# Altium PCB PCB1.PcbDoc
Units mm, origin at the board's own origin, x right, y up, seen from the top; angles counter-clockwise.
Board outline 152.4 x 101.6 mm, 2 copper layers (Top Layer, Bottom Layer); 130 components, 1 nets, 274 pads, 128 vias.
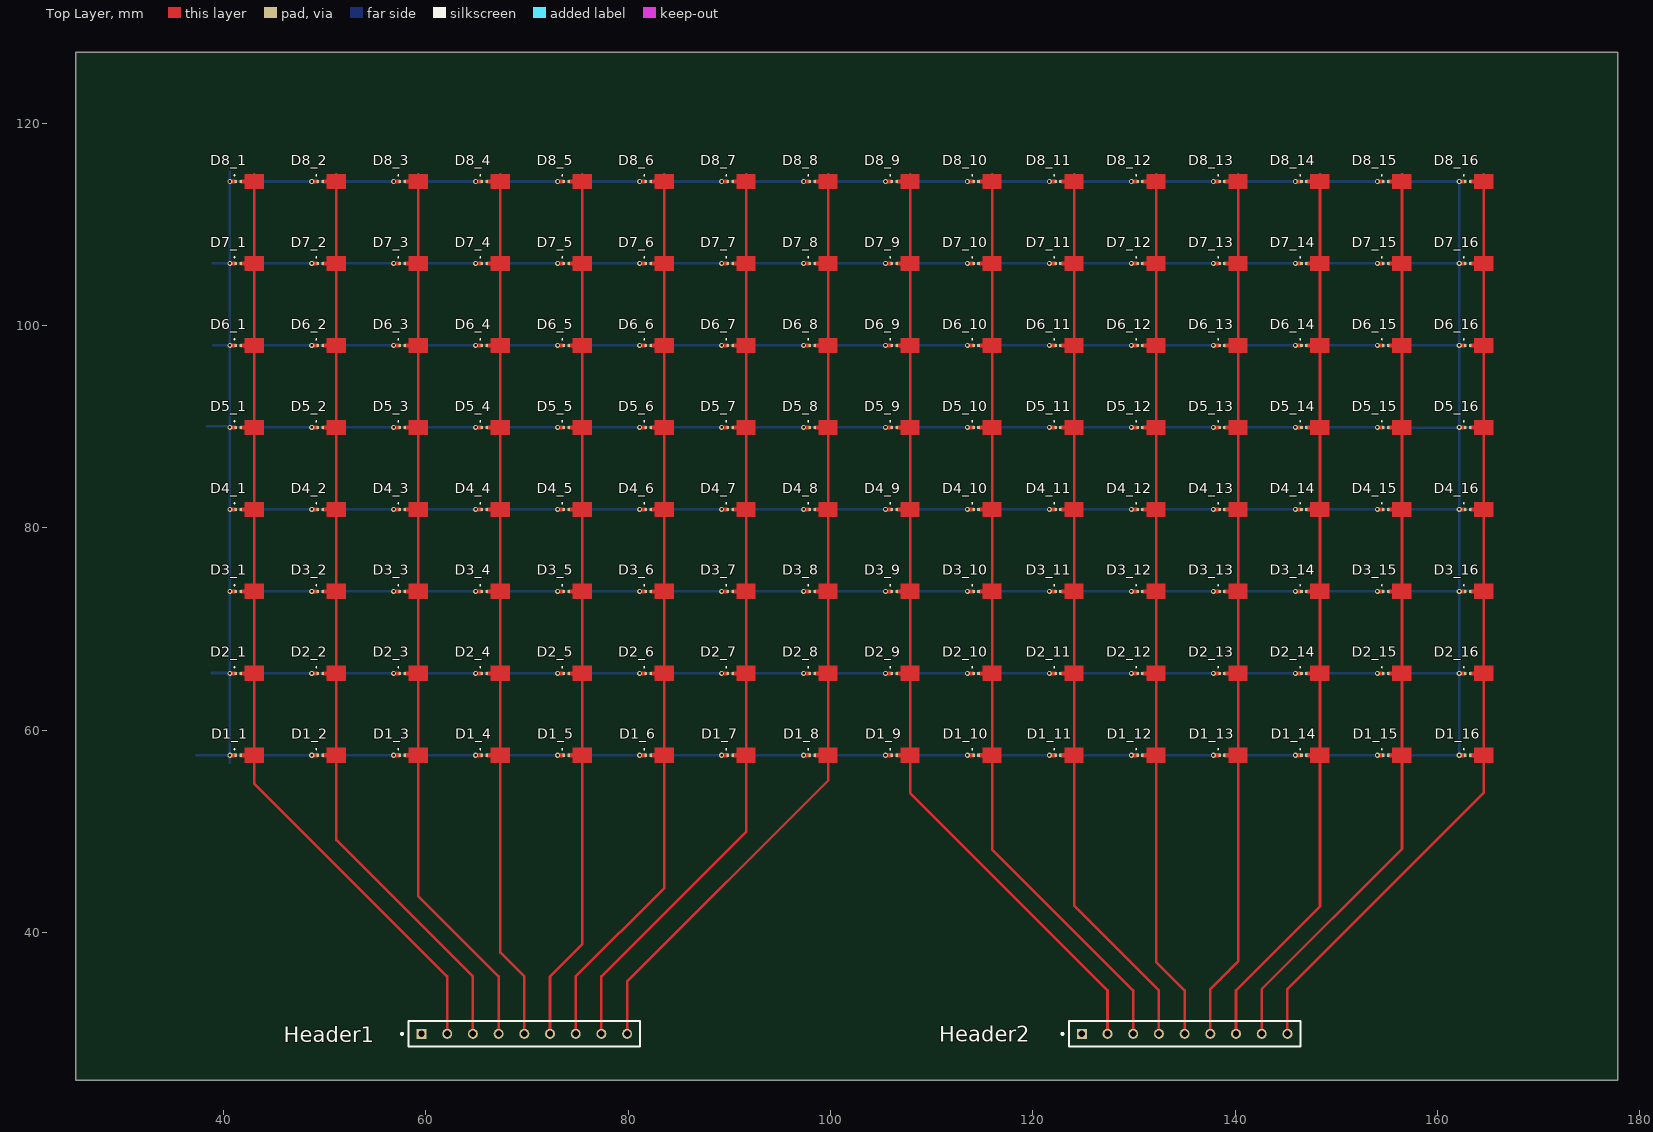
[diagram p0: Top Layer view]
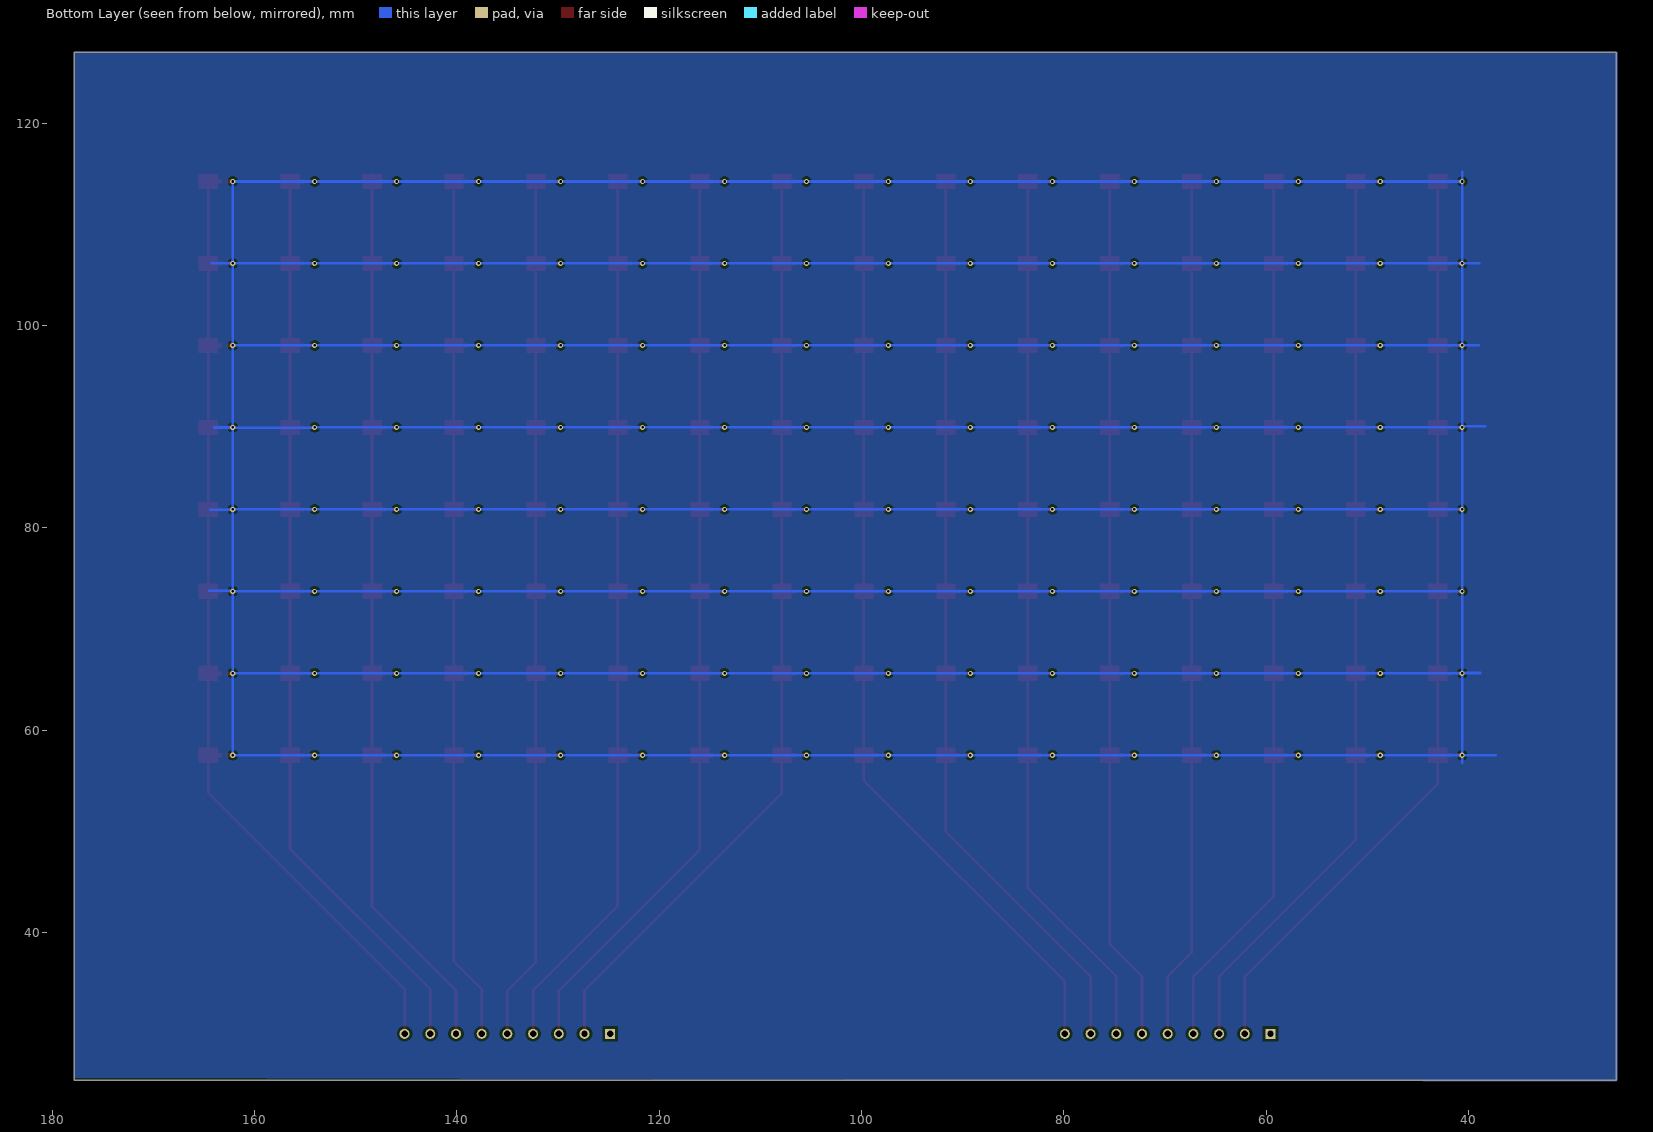
[diagram p1: Bottom Layer view, seen from below]

## Layer stack, top to bottom
Top Solder: solder mask 0.0102, Solder Resist, Dk 3.5
Top Layer: signal copper 0.0356
Dielectric 1: dielectric 0.32, RO4350B , Dk 3.48
Bottom Layer: signal copper 0.0356
Bottom Solder: solder mask 0.0102, Solder Resist, Dk 3.5

## Board outline
25.4,25.4 177.8,25.4 177.8,127 25.4,127

## Design rules (kind name [scope] priority, off if disabled: settings)
Clearance [All] p1: gap=0.254 ignorepadtopadclearanceinfootprint=FALSE
PolygonConnect [All] p1: connectstyle=Relief reliefconductorwidth=0.254 reliefentries=4 polygonreliefangle="90 Angle" airgapwidth=0.254
RoutingVias [All] p1: holewidth=0.711 width=1.27 viastyle="Through Hole" minholewidth=0.711 minwidth=1.27 maxholewidth=0.711 maxwidth=1.27
SolderMaskExpansion [All] p1: expansion=0.102 istentingtop=FALSE
Width [All] p1: maxlimit=0.254 minlimit=0.254 preferedwidth=0.254
30 further rules are at their usual default settings.

## Components (designator, comment, footprint, x,y, rotation, side; value= is the part's Value field where it differs from the comment)
D1_1 "Comment" DFN48P76X20-2N 41.49,57.531 r0 top
D1_2 "Comment" DFN48P76X20-2N 49.59,57.531 r0 top
D1_3 "Comment" DFN48P76X20-2N 57.69,57.531 r0 top
D1_4 "Comment" DFN48P76X20-2N 65.79,57.531 r0 top
D1_5 "Comment" DFN48P76X20-2N 73.89,57.531 r0 top
D1_6 "Comment" DFN48P76X20-2N 81.99,57.531 r0 top
D1_7 "Comment" DFN48P76X20-2N 90.09,57.531 r0 top
D1_8 "Comment" DFN48P76X20-2N 98.19,57.531 r0 top
D1_9 "Comment" DFN48P76X20-2N 106.29,57.531 r0 top
D1_10 "Comment" DFN48P76X20-2N 114.39,57.531 r0 top
D1_11 "Comment" DFN48P76X20-2N 122.49,57.531 r0 top
D1_12 "Comment" DFN48P76X20-2N 130.59,57.531 r0 top
D1_13 "Comment" DFN48P76X20-2N 138.69,57.531 r0 top
D1_14 "Comment" DFN48P76X20-2N 146.79,57.531 r0 top
D1_15 "Comment" DFN48P76X20-2N 154.89,57.531 r0 top
D1_16 "Comment" DFN48P76X20-2N 162.99,57.531 r0 top
D2_1 "Comment" DFN48P76X20-2N 41.49,65.631 r0 top
D2_2 "Comment" DFN48P76X20-2N 49.59,65.631 r0 top
D2_3 "Comment" DFN48P76X20-2N 57.69,65.631 r0 top
D2_4 "Comment" DFN48P76X20-2N 65.79,65.631 r0 top
D2_5 "Comment" DFN48P76X20-2N 73.89,65.631 r0 top
D2_6 "Comment" DFN48P76X20-2N 81.99,65.631 r0 top
D2_7 "Comment" DFN48P76X20-2N 90.09,65.631 r0 top
D2_8 "Comment" DFN48P76X20-2N 98.19,65.631 r0 top
D2_9 "Comment" DFN48P76X20-2N 106.29,65.631 r0 top
D2_10 "Comment" DFN48P76X20-2N 114.39,65.631 r0 top
D2_11 "Comment" DFN48P76X20-2N 122.49,65.631 r0 top
D2_12 "Comment" DFN48P76X20-2N 130.59,65.631 r0 top
D2_13 "Comment" DFN48P76X20-2N 138.69,65.631 r0 top
D2_14 "Comment" DFN48P76X20-2N 146.79,65.631 r0 top
D2_15 "Comment" DFN48P76X20-2N 154.89,65.631 r0 top
D2_16 "Comment" DFN48P76X20-2N 162.99,65.631 r0 top
D3_1 "Comment" DFN48P76X20-2N 41.49,73.731 r0 top
D3_2 "Comment" DFN48P76X20-2N 49.59,73.731 r0 top
D3_3 "Comment" DFN48P76X20-2N 57.69,73.731 r0 top
D3_4 "Comment" DFN48P76X20-2N 65.79,73.731 r0 top
D3_5 "Comment" DFN48P76X20-2N 73.89,73.731 r0 top
D3_6 "Comment" DFN48P76X20-2N 81.99,73.731 r0 top
D3_7 "Comment" DFN48P76X20-2N 90.09,73.731 r0 top
D3_8 "Comment" DFN48P76X20-2N 98.19,73.731 r0 top
D3_9 "Comment" DFN48P76X20-2N 106.29,73.731 r0 top
D3_10 "Comment" DFN48P76X20-2N 114.39,73.731 r0 top
D3_11 "Comment" DFN48P76X20-2N 122.49,73.731 r0 top
D3_12 "Comment" DFN48P76X20-2N 130.59,73.731 r0 top
D3_13 "Comment" DFN48P76X20-2N 138.69,73.731 r0 top
D3_14 "Comment" DFN48P76X20-2N 146.79,73.731 r0 top
D3_15 "Comment" DFN48P76X20-2N 154.89,73.731 r0 top
D3_16 "Comment" DFN48P76X20-2N 162.99,73.731 r0 top
D4_1 "Comment" DFN48P76X20-2N 41.49,81.831 r0 top
D4_2 "Comment" DFN48P76X20-2N 49.59,81.831 r0 top
D4_3 "Comment" DFN48P76X20-2N 57.69,81.831 r0 top
D4_4 "Comment" DFN48P76X20-2N 65.79,81.831 r0 top
D4_5 "Comment" DFN48P76X20-2N 73.89,81.831 r0 top
D4_6 "Comment" DFN48P76X20-2N 81.99,81.831 r0 top
D4_7 "Comment" DFN48P76X20-2N 90.09,81.831 r0 top
D4_8 "Comment" DFN48P76X20-2N 98.19,81.831 r0 top
D4_9 "Comment" DFN48P76X20-2N 106.29,81.831 r0 top
D4_10 "Comment" DFN48P76X20-2N 114.39,81.831 r0 top
D4_11 "Comment" DFN48P76X20-2N 122.49,81.831 r0 top
D4_12 "Comment" DFN48P76X20-2N 130.59,81.831 r0 top
D4_13 "Comment" DFN48P76X20-2N 138.69,81.831 r0 top
D4_14 "Comment" DFN48P76X20-2N 146.79,81.831 r0 top
D4_15 "Comment" DFN48P76X20-2N 154.89,81.831 r0 top
D4_16 "Comment" DFN48P76X20-2N 162.99,81.831 r0 top
D5_1 "Comment" DFN48P76X20-2N 41.49,89.931 r0 top
D5_2 "Comment" DFN48P76X20-2N 49.59,89.931 r0 top
D5_3 "Comment" DFN48P76X20-2N 57.69,89.931 r0 top
D5_4 "Comment" DFN48P76X20-2N 65.79,89.931 r0 top
D5_5 "Comment" DFN48P76X20-2N 73.89,89.931 r0 top
D5_6 "Comment" DFN48P76X20-2N 81.99,89.931 r0 top
D5_7 "Comment" DFN48P76X20-2N 90.09,89.931 r0 top
D5_8 "Comment" DFN48P76X20-2N 98.19,89.931 r0 top
D5_9 "Comment" DFN48P76X20-2N 106.29,89.931 r0 top
D5_10 "Comment" DFN48P76X20-2N 114.39,89.931 r0 top
D5_11 "Comment" DFN48P76X20-2N 122.49,89.931 r0 top
D5_12 "Comment" DFN48P76X20-2N 130.59,89.931 r0 top
D5_13 "Comment" DFN48P76X20-2N 138.69,89.931 r0 top
D5_14 "Comment" DFN48P76X20-2N 146.79,89.931 r0 top
D5_15 "Comment" DFN48P76X20-2N 154.89,89.931 r0 top
D5_16 "Comment" DFN48P76X20-2N 162.99,89.931 r0 top
D6_1 "Comment" DFN48P76X20-2N 41.49,98.031 r0 top
D6_2 "Comment" DFN48P76X20-2N 49.59,98.031 r0 top
D6_3 "Comment" DFN48P76X20-2N 57.69,98.031 r0 top
D6_4 "Comment" DFN48P76X20-2N 65.79,98.031 r0 top
D6_5 "Comment" DFN48P76X20-2N 73.89,98.031 r0 top
D6_6 "Comment" DFN48P76X20-2N 81.99,98.031 r0 top
D6_7 "Comment" DFN48P76X20-2N 90.09,98.031 r0 top
D6_8 "Comment" DFN48P76X20-2N 98.19,98.031 r0 top
D6_9 "Comment" DFN48P76X20-2N 106.29,98.031 r0 top
D6_10 "Comment" DFN48P76X20-2N 114.39,98.031 r0 top
D6_11 "Comment" DFN48P76X20-2N 122.49,98.031 r0 top
D6_12 "Comment" DFN48P76X20-2N 130.59,98.031 r0 top
D6_13 "Comment" DFN48P76X20-2N 138.69,98.031 r0 top
D6_14 "Comment" DFN48P76X20-2N 146.79,98.031 r0 top
D6_15 "Comment" DFN48P76X20-2N 154.89,98.031 r0 top
D6_16 "Comment" DFN48P76X20-2N 162.99,98.031 r0 top
D7_1 "Comment" DFN48P76X20-2N 41.49,106.131 r0 top
D7_2 "Comment" DFN48P76X20-2N 49.59,106.131 r0 top
D7_3 "Comment" DFN48P76X20-2N 57.69,106.131 r0 top
D7_4 "Comment" DFN48P76X20-2N 65.79,106.131 r0 top
D7_5 "Comment" DFN48P76X20-2N 73.89,106.131 r0 top
D7_6 "Comment" DFN48P76X20-2N 81.99,106.131 r0 top
D7_7 "Comment" DFN48P76X20-2N 90.09,106.131 r0 top
D7_8 "Comment" DFN48P76X20-2N 98.19,106.131 r0 top
D7_9 "Comment" DFN48P76X20-2N 106.29,106.131 r0 top
D7_10 "Comment" DFN48P76X20-2N 114.39,106.131 r0 top
D7_11 "Comment" DFN48P76X20-2N 122.49,106.131 r0 top
D7_12 "Comment" DFN48P76X20-2N 130.59,106.131 r0 top
D7_13 "Comment" DFN48P76X20-2N 138.69,106.131 r0 top
D7_14 "Comment" DFN48P76X20-2N 146.79,106.131 r0 top
D7_15 "Comment" DFN48P76X20-2N 154.89,106.131 r0 top
D7_16 "Comment" DFN48P76X20-2N 162.99,106.131 r0 top
D8_1 "Comment" DFN48P76X20-2N 41.49,114.231 r0 top
D8_2 "Comment" DFN48P76X20-2N 49.59,114.231 r0 top
D8_3 "Comment" DFN48P76X20-2N 57.69,114.231 r0 top
D8_4 "Comment" DFN48P76X20-2N 65.79,114.231 r0 top
D8_5 "Comment" DFN48P76X20-2N 73.89,114.231 r0 top
D8_6 "Comment" DFN48P76X20-2N 81.99,114.231 r0 top
D8_7 "Comment" DFN48P76X20-2N 90.09,114.231 r0 top
D8_8 "Comment" DFN48P76X20-2N 98.19,114.231 r0 top
D8_9 "Comment" DFN48P76X20-2N 106.29,114.231 r0 top
D8_10 "Comment" DFN48P76X20-2N 114.39,114.231 r0 top
D8_11 "Comment" DFN48P76X20-2N 122.49,114.231 r0 top
D8_12 "Comment" DFN48P76X20-2N 130.59,114.231 r0 top
D8_13 "Comment" DFN48P76X20-2N 138.69,114.231 r0 top
D8_14 "Comment" DFN48P76X20-2N 146.79,114.231 r0 top
D8_15 "Comment" DFN48P76X20-2N 154.89,114.231 r0 top
D8_16 "Comment" DFN48P76X20-2N 162.99,114.231 r0 top
Header1 "Comment" SAMTEC_TS-109-G-AA 69.746,30 r0 top
Header2 "Comment" SAMTEC_TS-109-G-AA 135.001,30 r0 top

## Footprints (in the part's own frame and the unit in brackets; to place one, negate y for a bottom-side part, rotate by r counter-clockwise, add the part's x,y. Pads: shape width x height; smd on the part's side, far side on the other; paste and mask are expansions set on the pad)
DFN48P76X20-2N [mm] "DFN, 2-Leads, Body 0.39x0.76mm, Pitch 0.48mm, IPC Medium Density"
  rect 0.25x0.3 smd: 1(-0.24,0) 2(0.24,0)
  silkscreen extent -0.43,0.55 -0.34,0.65, body extent -0.39,-0.2 0.39,0.2, height 0.2
SAMTEC_TS-109-G-AA [mm]
  rect 0.985x0.985 / inner round 0.985 / far side rect 0.985x0.985 hole 0.635: 01(-10.16,0)
  round 0.985 hole 0.635: 02(-7.62,0) 03(-5.08,0) 04(-2.54,0) 05(0,0) 06(2.54,0) 07(5.08,0) 08(7.62,0) 09(10.16,0)
  silkscreen extent -12.18,-1.27 11.43,1.27

## Via types
v1: diameter 0.5, hole 0.25, Top Layer to Bottom Layer, 128 vias

## Nets (pads, with @x,y where several pads share a name; then routed paths per layer and width w, separated by ;. In a path a pad name is that pad's centre, name@x,y a point inside that pad or via, vN(x,y) a via of type N, cw(c..) or ccw(c..) an arc to the next point about the centre after c; other vN are vias at no path point)
GND: 
  other v1: 40.64,57.531
pads on no net: D1_1.1 D1_1.2 D1_2.1 D1_2.2 D1_3.1 D1_3.2 D1_4.1 D1_4.2 D1_5.1 D1_5.2 D1_6.1 D1_6.2 D1_7.1 D1_7.2 D1_8.1 D1_8.2 D1_9.1 D1_9.2 D1_10.1 D1_10.2 D1_11.1 D1_11.2 D1_12.1 D1_12.2 D1_13.1 D1_13.2 D1_14.1 D1_14.2 D1_15.1 D1_15.2 D1_16.1 D1_16.2 D2_1.1 D2_1.2 D2_2.1 D2_2.2 D2_3.1 D2_3.2 D2_4.1 D2_4.2 D2_5.1 D2_5.2 D2_6.1 D2_6.2 D2_7.1 D2_7.2 D2_8.1 D2_8.2 D2_9.1 D2_9.2 D2_10.1 D2_10.2 D2_11.1 D2_11.2 D2_12.1 D2_12.2 D2_13.1 D2_13.2 D2_14.1 D2_14.2 D2_15.1 D2_15.2 D2_16.1 D2_16.2 D3_1.1 D3_1.2 D3_2.1 D3_2.2 D3_3.1 D3_3.2 D3_4.1 D3_4.2 D3_5.1 D3_5.2 D3_6.1 D3_6.2 D3_7.1 D3_7.2 D3_8.1 D3_8.2 D3_9.1 D3_9.2 D3_10.1 D3_10.2 D3_11.1 D3_11.2 D3_12.1 D3_12.2 D3_13.1 D3_13.2 D3_14.1 D3_14.2 D3_15.1 D3_15.2 D3_16.1 D3_16.2 D4_1.1 D4_1.2 D4_2.1 D4_2.2 D4_3.1 D4_3.2 D4_4.1 D4_4.2 D4_5.1 D4_5.2 D4_6.1 D4_6.2 D4_7.1 D4_7.2 D4_8.1 D4_8.2 D4_9.1 D4_9.2 D4_10.1 D4_10.2 D4_11.1 D4_11.2 D4_12.1 D4_12.2 D4_13.1 D4_13.2 D4_14.1 D4_14.2 D4_15.1 D4_15.2 D4_16.1 D4_16.2 D5_1.1 D5_1.2 D5_2.1 D5_2.2 D5_3.1 D5_3.2 D5_4.1 D5_4.2 D5_5.1 D5_5.2 D5_6.1 D5_6.2 D5_7.1 D5_7.2 D5_8.1 D5_8.2 D5_9.1 D5_9.2 D5_10.1 D5_10.2 D5_11.1 D5_11.2 D5_12.1 D5_12.2 D5_13.1 D5_13.2 D5_14.1 D5_14.2 D5_15.1 D5_15.2 D5_16.1 D5_16.2 D6_1.1 D6_1.2 D6_2.1 D6_2.2 D6_3.1 D6_3.2 D6_4.1 D6_4.2 D6_5.1 D6_5.2 D6_6.1 D6_6.2 D6_7.1 D6_7.2 D6_8.1 D6_8.2 D6_9.1 D6_9.2 D6_10.1 D6_10.2 D6_11.1 D6_11.2 D6_12.1 D6_12.2 D6_13.1 D6_13.2 D6_14.1 D6_14.2 D6_15.1 D6_15.2 D6_16.1 D6_16.2 D7_1.1 D7_1.2 D7_2.1 D7_2.2 D7_3.1 D7_3.2 D7_4.1 D7_4.2 D7_5.1 D7_5.2 D7_6.1 D7_6.2 D7_7.1 D7_7.2 D7_8.1 D7_8.2 D7_9.1 D7_9.2 D7_10.1 D7_10.2 D7_11.1 D7_11.2 D7_12.1 D7_12.2 D7_13.1 D7_13.2 D7_14.1 D7_14.2 D7_15.1 D7_15.2 D7_16.1 D7_16.2 D8_1.1 D8_1.2 D8_2.1 D8_2.2 D8_3.1 D8_3.2 D8_4.1 D8_4.2 D8_5.1 D8_5.2 D8_6.1 D8_6.2 D8_7.1 D8_7.2 D8_8.1 D8_8.2 D8_9.1 D8_9.2 D8_10.1 D8_10.2 D8_11.1 D8_11.2 D8_12.1 D8_12.2 D8_13.1 D8_13.2 D8_14.1 D8_14.2 D8_15.1 D8_15.2 D8_16.1 D8_16.2 Header1.01 Header1.02 Header1.03 Header1.04 Header1.05 Header1.06 Header1.07 Header1.08 Header1.09 Header2.01 Header2.02 Header2.03 Header2.04 Header2.05 Header2.06 Header2.07 Header2.08 Header2.09
copper on no net: | length 2549
  Top Layer w0.254: 43.053,114.935 43.053,60.579 43.053,54.737 62.126,35.664 62.126,30 ; 51.181,114.935 51.181,55.245 51.181,49.149 64.666,35.664 64.666,30 ; 59.281,114.935 59.281,55.245 59.281,43.589 67.206,35.664 67.206,30 ; 67.381,114.935 67.381,55.245 67.381,38.029 69.746,35.664 69.746,30 ; 72.286,30 72.286,35.664 75.481,38.859 75.481,55.245 75.481,114.935 ; 74.826,30 74.826,35.664 83.581,44.419 83.581,55.245 83.581,114.935 ; 77.366,30 77.366,35.664 91.681,49.979 91.681,55.245 91.681,114.935 ; 79.906,30 79.906,35.179 99.781,55.054 99.781,55.245 99.781,114.935 ; 107.881,114.935 107.881,55.245 107.881,53.79 127.381,34.29 127.381,30 ; 115.981,114.935 115.981,55.245 115.981,48.23 129.921,34.29 129.921,30 ; 124.081,114.935 124.081,55.245 124.081,42.67 132.461,34.29 132.461,30 ; 132.181,114.935 132.181,55.245 132.181,37.11 135.001,34.29 135.001,30 ; 137.541,30 137.541,34.417 140.281,37.157 140.281,55.245 140.281,114.935 ; 140.081,30 140.081,34.29 148.381,42.59 148.381,55.245 148.381,114.935 ; 142.621,30 142.621,34.417 156.481,48.277 156.481,55.245 156.481,114.935 ; 145.161,30 145.161,34.417 164.581,53.837 164.581,55.245 164.581,114.935
  Bottom Layer w0.254: 37.338,57.531 v1(48.74,57.531) v1(64.94,57.531) 73.025,57.531 v1(89.24,57.531) v1(105.44,57.531) v1(121.64,57.531) v1(137.84,57.531) v1(154.04,57.531) v1(162.14,57.531) v1(162.14,65.631) ; 38.354,90.043 40.528,90.043 v1(40.64,89.931) ; 38.862,65.659 40.612,65.659 v1(40.64,65.631) v1(48.74,65.631) v1(56.84,65.631) v1(64.94,65.631) v1(73.04,65.631) v1(81.14,65.631) v1(97.34,65.631) v1(113.54,65.631) v1(129.74,65.631) v1(145.94,65.631) v1(162.14,65.631) ; 38.948,106.131 v1(48.74,106.131) v1(64.94,106.131) v1(81.14,106.131) v1(97.34,106.131) v1(113.54,106.131) v1(129.74,106.131) v1(145.94,106.131) v1(162.14,106.131) 162.181,106.172 164.211,106.172 ; 38.989,98.044 40.627,98.044 v1(40.64,98.031) v1(56.84,98.031) v1(73.04,98.031) v1(89.24,98.031) v1(105.44,98.031) v1(121.64,98.031) v1(137.84,98.031) v1(154.04,98.031) v1(162.14,98.031) ; 40.64,56.769 40.64,57.531 v1(40.64,73.731) ; v1(40.64,114.231) v1(48.74,114.231) v1(64.94,114.231) v1(81.14,114.231) v1(97.34,114.231) v1(113.54,114.231) v1(129.74,114.231) v1(145.94,114.231) v1(162.14,114.231) v1(162.14,98.031) ; 40.64,115.189 v1(40.64,106.131) v1(40.64,89.931) ; v1(162.14,89.931) 163.942,89.931 163.957,89.916 154.055,89.916 v1(154.04,89.931) v1(137.84,89.931) v1(121.64,89.931) v1(105.44,89.931) v1(89.24,89.931) v1(73.04,89.931) v1(56.84,89.931) v1(40.64,89.931) ; v1@162.153,98.044 v1(162.14,98.031) ; 164.338,81.788 162.183,81.788 v1(162.14,81.831) ; 164.465,73.787 162.196,73.787 v1(162.14,73.731) v1(145.94,73.731) v1(129.74,73.731) v1(121.64,73.731) v1(105.44,73.731) v1(89.24,73.731) v1(73.04,73.731) v1(56.84,73.731) v1(40.64,73.731) ; v1(40.64,73.731) v1(40.64,81.831) v1(56.84,81.831) v1(73.04,81.831) v1(89.24,81.831) v1(105.44,81.831) v1(113.54,81.831) v1(129.74,81.831) v1(145.94,81.831) v1(162.14,81.831) ; v1(40.64,73.731) v1(40.64,89.931) ; v1(162.14,65.631) v1(162.14,81.831) ; v1(162.14,81.831) v1(162.14,98.031)
  other v1: 56.84,57.531 73.04,57.531 81.14,57.531 97.34,57.531 113.54,57.531 129.74,57.531 145.94,57.531 89.24,65.631 105.44,65.631 121.64,65.631 137.84,65.631 154.04,65.631 48.74,73.731 64.94,73.731 81.14,73.731 97.34,73.731 113.54,73.731 137.84,73.731 154.04,73.731 48.74,81.831 64.94,81.831 81.14,81.831 97.34,81.831 121.64,81.831 137.84,81.831 154.04,81.831 48.74,89.931 64.94,89.931 81.14,89.931 97.34,89.931 113.54,89.931 129.74,89.931 145.94,89.931 48.74,98.031 64.94,98.031 81.14,98.031 97.34,98.031 113.54,98.031 129.74,98.031 145.94,98.031 56.84,106.131 73.04,106.131 89.24,106.131 105.44,106.131 121.64,106.131 137.84,106.131 154.04,106.131 56.84,114.231 73.04,114.231 89.24,114.231 105.44,114.231 121.64,114.231 137.84,114.231 154.04,114.231

## Polygon pours and split planes (outlines as drawn)
no net on Bottom Layer "GND" (solid, pour order 0): 25.273,25.273 25.273,127 177.673,127 177.8,126.873 177.8,25.654

## Other copper
Top Layer:
  rectangle: 163.615,56.781 165.515,58.281
  rectangle: 163.215,57.331 163.665,57.731
  rectangle: 162.253,57.331 162.765,57.731
  rectangle: 163.615,64.881 165.515,66.381
  rectangle: 163.215,65.431 163.665,65.831
  rectangle: 162.253,65.431 162.765,65.831
  rectangle: 163.615,72.981 165.515,74.481
  rectangle: 163.215,73.531 163.665,73.931
  rectangle: 162.253,73.531 162.765,73.931
  rectangle: 163.615,81.081 165.515,82.581
  rectangle: 163.215,81.631 163.665,82.031
  rectangle: 162.253,81.631 162.765,82.031
  rectangle: 163.615,89.181 165.515,90.681
  rectangle: 163.215,89.731 163.665,90.131
  rectangle: 162.253,89.731 162.765,90.131
  rectangle: 163.615,97.281 165.515,98.781
  rectangle: 163.215,97.831 163.665,98.231
  rectangle: 162.253,97.831 162.765,98.231
  rectangle: 163.615,105.381 165.515,106.881
  rectangle: 163.215,105.931 163.665,106.331
  rectangle: 162.253,105.931 162.765,106.331
  rectangle: 163.615,113.481 165.515,114.981
  rectangle: 163.215,114.031 163.665,114.431
  rectangle: 162.253,114.031 162.765,114.431
  rectangle: 155.515,56.781 157.415,58.281
  rectangle: 155.115,57.331 155.565,57.731
  rectangle: 154.153,57.331 154.665,57.731
  rectangle: 155.515,64.881 157.415,66.381
  rectangle: 155.115,65.431 155.565,65.831
  rectangle: 154.153,65.431 154.665,65.831
  rectangle: 155.515,72.981 157.415,74.481
  rectangle: 155.115,73.531 155.565,73.931
  rectangle: 154.153,73.531 154.665,73.931
  rectangle: 155.515,81.081 157.415,82.581
  rectangle: 155.115,81.631 155.565,82.031
  rectangle: 154.153,81.631 154.665,82.031
  rectangle: 155.515,89.181 157.415,90.681
  rectangle: 155.115,89.731 155.565,90.131
  rectangle: 154.153,89.731 154.665,90.131
  rectangle: 155.515,97.281 157.415,98.781
  rectangle: 155.115,97.831 155.565,98.231
  rectangle: 154.153,97.831 154.665,98.231
  rectangle: 155.515,105.381 157.415,106.881
  rectangle: 155.115,105.931 155.565,106.331
  rectangle: 154.153,105.931 154.665,106.331
  rectangle: 155.515,113.481 157.415,114.981
  rectangle: 155.115,114.031 155.565,114.431
  rectangle: 154.153,114.031 154.665,114.431
  rectangle: 147.415,56.781 149.315,58.281
  rectangle: 147.015,57.331 147.465,57.731
  rectangle: 146.053,57.331 146.565,57.731
  rectangle: 147.415,64.881 149.315,66.381
  rectangle: 147.015,65.431 147.465,65.831
  rectangle: 146.053,65.431 146.565,65.831
  rectangle: 147.415,72.981 149.315,74.481
  rectangle: 147.015,73.531 147.465,73.931
  rectangle: 146.053,73.531 146.565,73.931
  rectangle: 147.415,81.081 149.315,82.581
  rectangle: 147.015,81.631 147.465,82.031
  rectangle: 146.053,81.631 146.565,82.031
  rectangle: 147.415,89.181 149.315,90.681
  rectangle: 147.015,89.731 147.465,90.131
  rectangle: 146.053,89.731 146.565,90.131
  rectangle: 147.415,97.281 149.315,98.781
  rectangle: 147.015,97.831 147.465,98.231
  rectangle: 146.053,97.831 146.565,98.231
  rectangle: 147.415,105.381 149.315,106.881
  rectangle: 147.015,105.931 147.465,106.331
  rectangle: 146.053,105.931 146.565,106.331
  rectangle: 147.415,113.481 149.315,114.981
  rectangle: 147.015,114.031 147.465,114.431
  rectangle: 146.053,114.031 146.565,114.431
  rectangle: 139.315,56.781 141.215,58.281
  rectangle: 138.915,57.331 139.365,57.731
  rectangle: 137.953,57.331 138.465,57.731
  rectangle: 139.315,64.881 141.215,66.381
  rectangle: 138.915,65.431 139.365,65.831
  rectangle: 137.953,65.431 138.465,65.831
  rectangle: 139.315,72.981 141.215,74.481
  rectangle: 138.915,73.531 139.365,73.931
  rectangle: 137.953,73.531 138.465,73.931
  rectangle: 139.315,81.081 141.215,82.581
  rectangle: 138.915,81.631 139.365,82.031
  rectangle: 137.953,81.631 138.465,82.031
  rectangle: 139.315,89.181 141.215,90.681
  rectangle: 138.915,89.731 139.365,90.131
  rectangle: 137.953,89.731 138.465,90.131
  rectangle: 139.315,97.281 141.215,98.781
  rectangle: 138.915,97.831 139.365,98.231
  rectangle: 137.953,97.831 138.465,98.231
  rectangle: 139.315,105.381 141.215,106.881
  rectangle: 138.915,105.931 139.365,106.331
  rectangle: 137.953,105.931 138.465,106.331
  rectangle: 139.315,113.481 141.215,114.981
  rectangle: 138.915,114.031 139.365,114.431
  rectangle: 137.953,114.031 138.465,114.431
  rectangle: 131.215,56.781 133.115,58.281
  rectangle: 130.815,57.331 131.265,57.731
  rectangle: 129.853,57.331 130.365,57.731
  rectangle: 131.215,64.881 133.115,66.381
  rectangle: 130.815,65.431 131.265,65.831
  rectangle: 129.853,65.431 130.365,65.831
  rectangle: 131.215,72.981 133.115,74.481
  rectangle: 130.815,73.531 131.265,73.931
  rectangle: 129.853,73.531 130.365,73.931
  rectangle: 131.215,81.081 133.115,82.581
  rectangle: 130.815,81.631 131.265,82.031
  rectangle: 129.853,81.631 130.365,82.031
  rectangle: 131.215,89.181 133.115,90.681
  rectangle: 130.815,89.731 131.265,90.131
  rectangle: 129.853,89.731 130.365,90.131
  rectangle: 131.215,97.281 133.115,98.781
  rectangle: 130.815,97.831 131.265,98.231
  rectangle: 129.853,97.831 130.365,98.231
  rectangle: 131.215,105.381 133.115,106.881
  rectangle: 130.815,105.931 131.265,106.331
  rectangle: 129.853,105.931 130.365,106.331
  rectangle: 131.215,113.481 133.115,114.981
  rectangle: 130.815,114.031 131.265,114.431
  rectangle: 129.853,114.031 130.365,114.431
  rectangle: 123.115,56.781 125.015,58.281
  rectangle: 122.715,57.331 123.165,57.731
  rectangle: 121.753,57.331 122.265,57.731
  rectangle: 123.115,64.881 125.015,66.381
  rectangle: 122.715,65.431 123.165,65.831
  rectangle: 121.753,65.431 122.265,65.831
  rectangle: 123.115,72.981 125.015,74.481
  rectangle: 122.715,73.531 123.165,73.931
  rectangle: 121.753,73.531 122.265,73.931
  rectangle: 123.115,81.081 125.015,82.581
  rectangle: 122.715,81.631 123.165,82.031
  rectangle: 121.753,81.631 122.265,82.031
  rectangle: 123.115,89.181 125.015,90.681
  rectangle: 122.715,89.731 123.165,90.131
  rectangle: 121.753,89.731 122.265,90.131
  rectangle: 123.115,97.281 125.015,98.781
  rectangle: 122.715,97.831 123.165,98.231
  rectangle: 121.753,97.831 122.265,98.231
  rectangle: 123.115,105.381 125.015,106.881
  rectangle: 122.715,105.931 123.165,106.331
  rectangle: 121.753,105.931 122.265,106.331
  rectangle: 123.115,113.481 125.015,114.981
  rectangle: 122.715,114.031 123.165,114.431
  rectangle: 121.753,114.031 122.265,114.431
  rectangle: 115.015,56.781 116.915,58.281
  rectangle: 114.615,57.331 115.065,57.731
  rectangle: 113.653,57.331 114.165,57.731
  rectangle: 115.015,64.881 116.915,66.381
  rectangle: 114.615,65.431 115.065,65.831
  rectangle: 113.653,65.431 114.165,65.831
  rectangle: 115.015,72.981 116.915,74.481
  rectangle: 114.615,73.531 115.065,73.931
  rectangle: 113.653,73.531 114.165,73.931
  rectangle: 115.015,81.081 116.915,82.581
  rectangle: 114.615,81.631 115.065,82.031
  rectangle: 113.653,81.631 114.165,82.031
  rectangle: 115.015,89.181 116.915,90.681
  rectangle: 114.615,89.731 115.065,90.131
  rectangle: 113.653,89.731 114.165,90.131
  rectangle: 115.015,97.281 116.915,98.781
  rectangle: 114.615,97.831 115.065,98.231
  rectangle: 113.653,97.831 114.165,98.231
  rectangle: 115.015,105.381 116.915,106.881
  rectangle: 114.615,105.931 115.065,106.331
  rectangle: 113.653,105.931 114.165,106.331
  rectangle: 115.015,113.481 116.915,114.981
  rectangle: 114.615,114.031 115.065,114.431
  rectangle: 113.653,114.031 114.165,114.431
  rectangle: 106.915,56.781 108.815,58.281
  rectangle: 106.515,57.331 106.965,57.731
  rectangle: 105.553,57.331 106.065,57.731
  rectangle: 106.915,64.881 108.815,66.381
  rectangle: 106.515,65.431 106.965,65.831
  rectangle: 105.553,65.431 106.065,65.831
  rectangle: 106.915,72.981 108.815,74.481
  rectangle: 106.515,73.531 106.965,73.931
  rectangle: 105.553,73.531 106.065,73.931
  rectangle: 106.915,81.081 108.815,82.581
  rectangle: 106.515,81.631 106.965,82.031
  rectangle: 105.553,81.631 106.065,82.031
  rectangle: 106.915,89.181 108.815,90.681
  rectangle: 106.515,89.731 106.965,90.131
  rectangle: 105.553,89.731 106.065,90.131
  rectangle: 106.915,97.281 108.815,98.781
  rectangle: 106.515,97.831 106.965,98.231
  rectangle: 105.553,97.831 106.065,98.231
  rectangle: 106.915,105.381 108.815,106.881
  rectangle: 106.515,105.931 106.965,106.331
  rectangle: 105.553,105.931 106.065,106.331
  rectangle: 106.915,113.481 108.815,114.981
  rectangle: 106.515,114.031 106.965,114.431
  rectangle: 105.553,114.031 106.065,114.431
  rectangle: 98.815,56.781 100.715,58.281
  rectangle: 98.415,57.331 98.865,57.731
  rectangle: 97.453,57.331 97.965,57.731
  rectangle: 98.815,64.881 100.715,66.381
  rectangle: 98.415,65.431 98.865,65.831
  rectangle: 97.453,65.431 97.965,65.831
  rectangle: 98.815,72.981 100.715,74.481
  rectangle: 98.415,73.531 98.865,73.931
  rectangle: 97.453,73.531 97.965,73.931
  rectangle: 98.815,81.081 100.715,82.581
  rectangle: 98.415,81.631 98.865,82.031
  rectangle: 97.453,81.631 97.965,82.031
  rectangle: 98.815,89.181 100.715,90.681
  rectangle: 98.415,89.731 98.865,90.131
  rectangle: 97.453,89.731 97.965,90.131
  rectangle: 98.815,97.281 100.715,98.781
  rectangle: 98.415,97.831 98.865,98.231
  rectangle: 97.453,97.831 97.965,98.231
  rectangle: 98.815,105.381 100.715,106.881
  rectangle: 98.415,105.931 98.865,106.331
  rectangle: 97.453,105.931 97.965,106.331
  rectangle: 98.815,113.481 100.715,114.981
  rectangle: 98.415,114.031 98.865,114.431
  rectangle: 97.453,114.031 97.965,114.431
  rectangle: 90.715,56.781 92.615,58.281
  rectangle: 90.315,57.331 90.765,57.731
  rectangle: 89.353,57.331 89.865,57.731
  rectangle: 90.715,64.881 92.615,66.381
  rectangle: 90.315,65.431 90.765,65.831
  rectangle: 89.353,65.431 89.865,65.831
  rectangle: 90.715,72.981 92.615,74.481
  rectangle: 90.315,73.531 90.765,73.931
  rectangle: 89.353,73.531 89.865,73.931
  rectangle: 90.715,81.081 92.615,82.581
  rectangle: 90.315,81.631 90.765,82.031
  rectangle: 89.353,81.631 89.865,82.031
  rectangle: 90.715,89.181 92.615,90.681
  rectangle: 90.315,89.731 90.765,90.131
  rectangle: 89.353,89.731 89.865,90.131
  rectangle: 90.715,97.281 92.615,98.781
  rectangle: 90.315,97.831 90.765,98.231
  rectangle: 89.353,97.831 89.865,98.231
  rectangle: 90.715,105.381 92.615,106.881
  rectangle: 90.315,105.931 90.765,106.331
  rectangle: 89.353,105.931 89.865,106.331
  rectangle: 90.715,113.481 92.615,114.981
  rectangle: 90.315,114.031 90.765,114.431
  rectangle: 89.353,114.031 89.865,114.431
  rectangle: 82.615,56.781 84.515,58.281
  rectangle: 82.215,57.331 82.665,57.731
  rectangle: 81.253,57.331 81.765,57.731
  rectangle: 82.615,64.881 84.515,66.381
  rectangle: 82.215,65.431 82.665,65.831
  rectangle: 81.253,65.431 81.765,65.831
  rectangle: 82.615,72.981 84.515,74.481
  rectangle: 82.215,73.531 82.665,73.931
  rectangle: 81.253,73.531 81.765,73.931
  rectangle: 82.615,81.081 84.515,82.581
  rectangle: 82.215,81.631 82.665,82.031
  rectangle: 81.253,81.631 81.765,82.031
  rectangle: 82.615,89.181 84.515,90.681
  rectangle: 82.215,89.731 82.665,90.131
  rectangle: 81.253,89.731 81.765,90.131
  rectangle: 82.615,97.281 84.515,98.781
  rectangle: 82.215,97.831 82.665,98.231
  rectangle: 81.253,97.831 81.765,98.231
  rectangle: 82.615,105.381 84.515,106.881
  rectangle: 82.215,105.931 82.665,106.331
  rectangle: 81.253,105.931 81.765,106.331
  rectangle: 82.615,113.481 84.515,114.981
  rectangle: 82.215,114.031 82.665,114.431
  rectangle: 81.253,114.031 81.765,114.431
  rectangle: 74.515,56.781 76.415,58.281
  rectangle: 74.115,57.331 74.565,57.731
  rectangle: 73.153,57.331 73.665,57.731
  rectangle: 74.515,64.881 76.415,66.381
  rectangle: 74.115,65.431 74.565,65.831
  rectangle: 73.153,65.431 73.665,65.831
  rectangle: 74.515,72.981 76.415,74.481
  rectangle: 74.115,73.531 74.565,73.931
  rectangle: 73.153,73.531 73.665,73.931
  rectangle: 74.515,81.081 76.415,82.581
  rectangle: 74.115,81.631 74.565,82.031
  rectangle: 73.153,81.631 73.665,82.031
  rectangle: 74.515,89.181 76.415,90.681
  rectangle: 74.115,89.731 74.565,90.131
  rectangle: 73.153,89.731 73.665,90.131
  rectangle: 74.515,97.281 76.415,98.781
  rectangle: 74.115,97.831 74.565,98.231
  rectangle: 73.153,97.831 73.665,98.231
  rectangle: 74.515,105.381 76.415,106.881
  rectangle: 74.115,105.931 74.565,106.331
  rectangle: 73.153,105.931 73.665,106.331
  rectangle: 74.515,113.481 76.415,114.981
  rectangle: 74.115,114.031 74.565,114.431
  rectangle: 73.153,114.031 73.665,114.431
  rectangle: 66.415,56.781 68.315,58.281
  rectangle: 66.015,57.331 66.465,57.731
  rectangle: 65.053,57.331 65.565,57.731
  rectangle: 66.415,64.881 68.315,66.381
  rectangle: 66.015,65.431 66.465,65.831
  rectangle: 65.053,65.431 65.565,65.831
  rectangle: 66.415,72.981 68.315,74.481
  rectangle: 66.015,73.531 66.465,73.931
  rectangle: 65.053,73.531 65.565,73.931
  rectangle: 66.415,81.081 68.315,82.581
  rectangle: 66.015,81.631 66.465,82.031
  rectangle: 65.053,81.631 65.565,82.031
  rectangle: 66.415,89.181 68.315,90.681
  rectangle: 66.015,89.731 66.465,90.131
  rectangle: 65.053,89.731 65.565,90.131
  rectangle: 66.415,97.281 68.315,98.781
  rectangle: 66.015,97.831 66.465,98.231
  rectangle: 65.053,97.831 65.565,98.231
  rectangle: 66.415,105.381 68.315,106.881
  rectangle: 66.015,105.931 66.465,106.331
  rectangle: 65.053,105.931 65.565,106.331
  rectangle: 66.415,113.481 68.315,114.981
  rectangle: 66.015,114.031 66.465,114.431
  rectangle: 65.053,114.031 65.565,114.431
  rectangle: 58.315,56.781 60.215,58.281
  rectangle: 57.915,57.331 58.365,57.731
  rectangle: 56.953,57.331 57.465,57.731
  rectangle: 58.315,64.881 60.215,66.381
  rectangle: 57.915,65.431 58.365,65.831
  rectangle: 56.953,65.431 57.465,65.831
  rectangle: 58.315,72.981 60.215,74.481
  rectangle: 57.915,73.531 58.365,73.931
  rectangle: 56.953,73.531 57.465,73.931
  rectangle: 58.315,81.081 60.215,82.581
  rectangle: 57.915,81.631 58.365,82.031
  rectangle: 56.953,81.631 57.465,82.031
  rectangle: 58.315,89.181 60.215,90.681
  rectangle: 57.915,89.731 58.365,90.131
  rectangle: 56.953,89.731 57.465,90.131
  rectangle: 58.315,97.281 60.215,98.781
  rectangle: 57.915,97.831 58.365,98.231
  rectangle: 56.953,97.831 57.465,98.231
  rectangle: 58.315,105.381 60.215,106.881
  rectangle: 57.915,105.931 58.365,106.331
  rectangle: 56.953,105.931 57.465,106.331
  rectangle: 58.315,113.481 60.215,114.981
  rectangle: 57.915,114.031 58.365,114.431
  rectangle: 56.953,114.031 57.465,114.431
  rectangle: 50.215,56.781 52.115,58.281
  rectangle: 49.815,57.331 50.265,57.731
  rectangle: 48.853,57.331 49.365,57.731
  rectangle: 50.215,64.881 52.115,66.381
  rectangle: 49.815,65.431 50.265,65.831
  rectangle: 48.853,65.431 49.365,65.831
  rectangle: 50.215,72.981 52.115,74.481
  rectangle: 49.815,73.531 50.265,73.931
  rectangle: 48.853,73.531 49.365,73.931
  rectangle: 50.215,81.081 52.115,82.581
  rectangle: 49.815,81.631 50.265,82.031
  rectangle: 48.853,81.631 49.365,82.031
  rectangle: 50.215,89.181 52.115,90.681
  rectangle: 49.815,89.731 50.265,90.131
  rectangle: 48.853,89.731 49.365,90.131
  rectangle: 50.215,97.281 52.115,98.781
  rectangle: 49.815,97.831 50.265,98.231
  rectangle: 48.853,97.831 49.365,98.231
  rectangle: 50.215,105.381 52.115,106.881
  rectangle: 49.815,105.931 50.265,106.331
  rectangle: 48.853,105.931 49.365,106.331
  rectangle: 50.215,113.481 52.115,114.981
  rectangle: 49.815,114.031 50.265,114.431
  rectangle: 48.853,114.031 49.365,114.431
  rectangle: 42.115,56.781 44.015,58.281
  rectangle: 41.715,57.331 42.165,57.731
  rectangle: 40.753,57.331 41.265,57.731
  rectangle: 42.115,64.881 44.015,66.381
  rectangle: 41.715,65.431 42.165,65.831
  rectangle: 40.753,65.431 41.265,65.831
  rectangle: 42.115,72.981 44.015,74.481
  rectangle: 41.715,73.531 42.165,73.931
  rectangle: 40.753,73.531 41.265,73.931
  rectangle: 42.115,81.081 44.015,82.581
  rectangle: 41.715,81.631 42.165,82.031
  rectangle: 40.753,81.631 41.265,82.031
  rectangle: 42.115,89.181 44.015,90.681
  rectangle: 41.715,89.731 42.165,90.131
  rectangle: 40.753,89.731 41.265,90.131
  rectangle: 42.115,97.281 44.015,98.781
  rectangle: 41.715,97.831 42.165,98.231
  rectangle: 40.753,97.831 41.265,98.231
  rectangle: 42.115,105.381 44.015,106.881
  rectangle: 41.715,105.931 42.165,106.331
  rectangle: 40.753,105.931 41.265,106.331
  rectangle: 42.115,113.481 44.015,114.981
  rectangle: 41.715,114.031 42.165,114.431
  rectangle: 40.753,114.031 41.265,114.431